# EAGLE board Mote_RgbLedStripController (EAGLE 7.5.0)
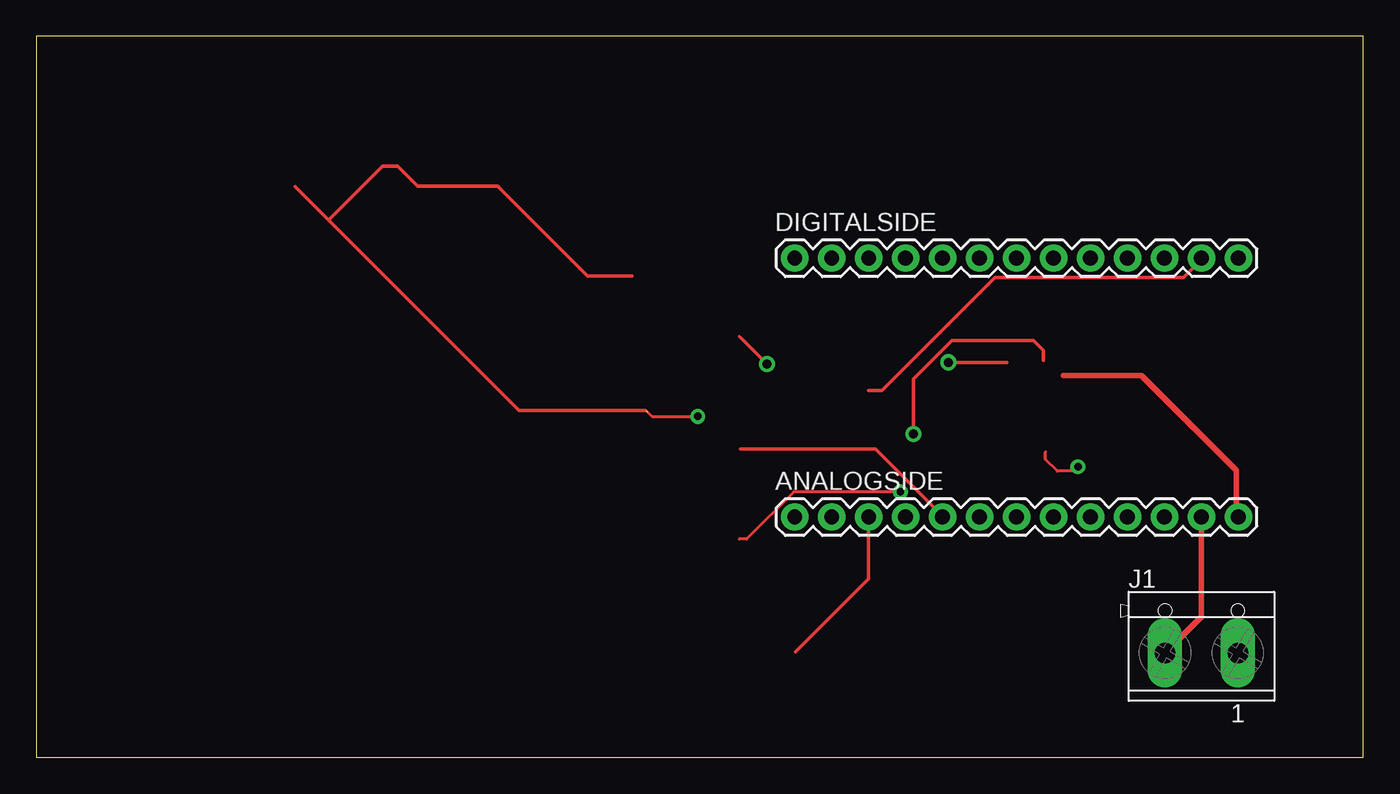
[diagram p0: board, top side]
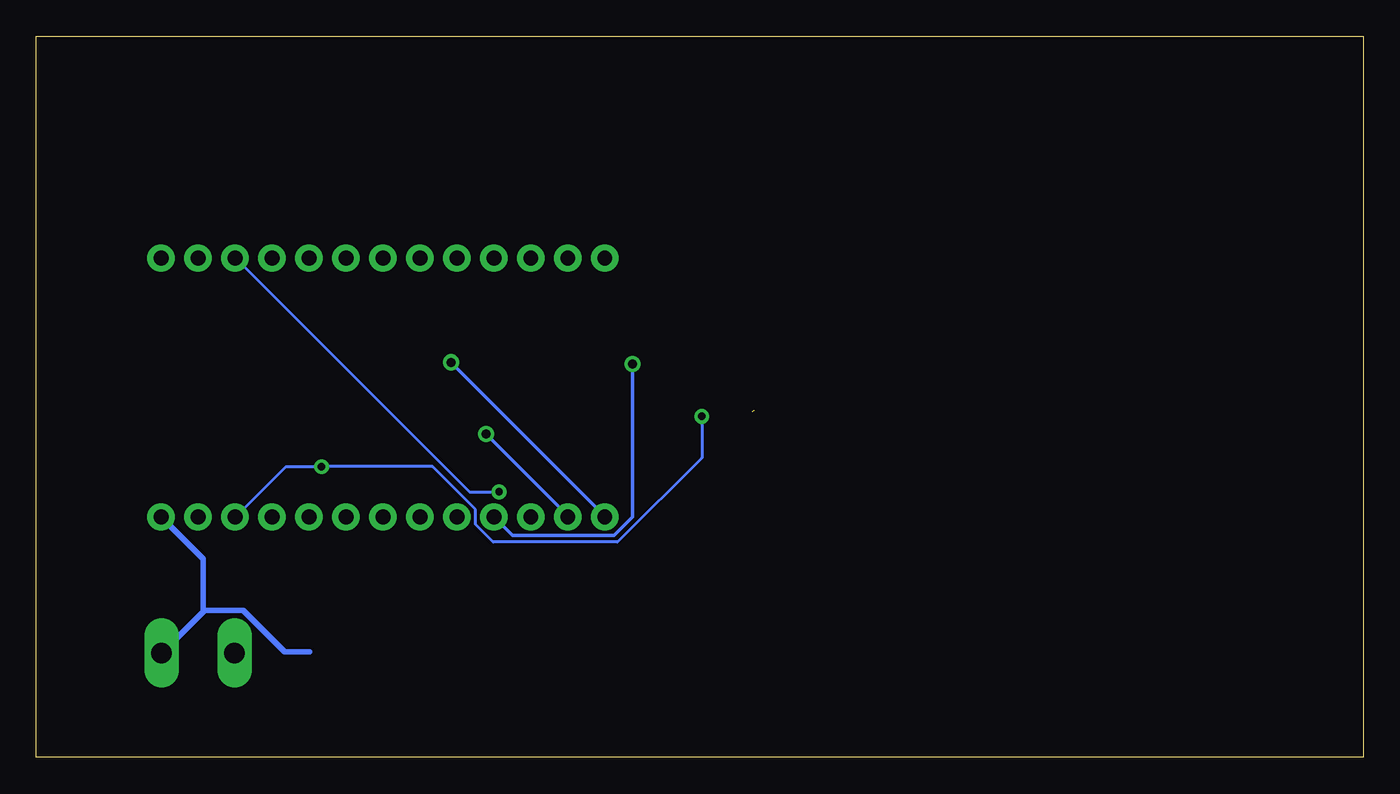
[diagram p1: board, bottom side, seen from below]

Size 91.11 x 49.52 mm. Coordinates in mm from the lower left corner, seen from the top.
Outline: 0,0 91.11,0 91.11,49.52 0,49.52 0,0
Copper layers (1*16): Top 0.035mm / dielectric 1.5mm / Bottom 0.035mm
Design rules "SparkFun": minimum track width 8mil, minimum drill 20mil, track to track 8mil, track to pad 8mil, pad to pad 8mil, via to via 8mil, smd to smd 8mil, copper to edge 10mil, drill to drill 8mil, minimum pad ring 12mil, minimum via ring 10mil, stop-mask expansion 4mil, vias tented up to drill 25mil, thermal gap 10mil
Net classes: 1 power: width 0.381 mm, clearance 0.254 mm

## Footprints (pad centres in the part's own frame; a part is rotated, then mirrored left to right if it is on the bottom)
1X13 = drill 1.016 pad 1.88: 1 0,0; 2 2.54,0; 3 5.08,0; 4 7.62,0; 5 10.16,0; 6 12.7,0; 7 15.24,0; 8 17.78,0; 9 20.32,0; 10 22.86,0; 11 25.4,0; 12 27.94,0; 13 30.48,0
TERMINAL_BLOCK_2P_5 = drill 1.4 pad 2.38 long: 1 2.5,-0.45; 2 -2.5,-0.45

## Placement (x,y rotation side)
ANALOGSIDE  M13  [1X13]  52.07,16.51 0 top
DIGITALSIDE  M13  [1X13]  52.07,34.29 0 top
J1  CON_TERMINAL_BLOCK_02-5MM  [TERMINAL_BLOCK_2P_5]  80.01,7.62 0 top

## Library data of the parts
ANALOGSIDE DIGITALSIDE = SparkFun-Connectors
J1 = dp_devices

## Nets
A0: ANALOGSIDE.1
A1: ANALOGSIDE.2
A2: ANALOGSIDE.3
A3: ANALOGSIDE.4
A4_SDA: ANALOGSIDE.5
A5_SCL: ANALOGSIDE.6
A6: ANALOGSIDE.7
A7: ANALOGSIDE.8
D0_RX: ANALOGSIDE.9
D1_TX: ANALOGSIDE.10
D2: DIGITALSIDE.12
D3: DIGITALSIDE.11
D4: DIGITALSIDE.10
D5: DIGITALSIDE.9
D6: DIGITALSIDE.8
D7: DIGITALSIDE.7
D8: DIGITALSIDE.6
D9: DIGITALSIDE.5
D10_SS: DIGITALSIDE.4
D11_MOSI: DIGITALSIDE.3
D12_MISO: DIGITALSIDE.2
D13_SCK: DIGITALSIDE.1
GND [power]: ANALOGSIDE.13 J1.1
PWR [power]: ANALOGSIDE.12 J1.2
RST: DIGITALSIDE.13
VCC: ANALOGSIDE.11

## Tracks (layer width: path | path; a pad name or v marks a point on that pad's centre or on a via)
A0  (via drill 0.61)
  Top 0.254: v62.64,27.13 66.64,27.13
  Bottom 0.254: v62.64,27.13 52.12,16.61 ANALOGSIDE.1
A1  (via drill 0.61)
  Top 0.254: 69.15,27.24 69.15,27.93 68.47,28.61 62.87,28.61 60.24,25.98 v60.24,22.21
  Bottom 0.254: v60.24,22.21 54.63,16.61 ANALOGSIDE.2
A2
  Top 0.254: ANALOGSIDE.3 57.15,12.27 52.12,7.24
A3  (via drill 0.61)
  Top 0.203: 48.26,28.9 48.35,28.84
  Top 0.254: v50.18,27.01 48.35,28.84
  Bottom 0.254: v50.18,27.01 50.18,16.5 51.44,15.24 58.41,15.24 59.66,16.5 ANALOGSIDE.4
A4_SDA
  Top 0.254: 48.35,21.18 57.61,21.18 62.18,16.61 ANALOGSIDE.5
D2
  Top 0.254: 57.15,25.18 58.06,25.18 65.84,32.96 78.75,32.96 80.01,34.21 DIGITALSIDE.12
D3  (via drill 0.51)
  Top 0.203: 48.26,14.99 48.77,14.99 52.02,18.24 v59.33,18.24
  Bottom 0.203: v59.33,18.24 61.37,18.24 77.42,34.29 DIGITALSIDE.11
GND
  Top 0.381: 82.53,16.61 ANALOGSIDE.13 82.41,16.73 82.41,19.7 75.89,26.21 70.52,26.21
  Bottom 0.381: 72.35,7.24 74.07,7.24 76.92,10.1 79.55,10.1 | 79.55,10.1 82.41,7.24 J1.1 | 79.55,10.1 79.67,10.21 79.67,13.64 82.53,16.5 ANALOGSIDE.13
PWR
  Top 0.381: ANALOGSIDE.12 80.01,9.64 77.61,7.24 J1.2
VCC  (via drill 0.51)  (1 unrouted)
  Top 0.203: 69.29,20.98 69.29,20.47 70.1,19.66 71.22,19.66 v71.53,19.96 | v45.41,23.42 42.27,23.42 41.96,23.72
  Top 0.254: 40.92,33.07 37.83,33.07 31.77,39.13 31.75,39.21 31.66,39.24 26.18,39.24 24.8,40.62 23.77,40.62 20.06,36.9 | 41.83,23.81 33.15,23.81 20.06,36.9 | 20.06,36.9 17.83,39.13 17.78,39.21
  Bottom 0.203: ANALOGSIDE.11 77.42,16.51 73.97,19.96 v71.53,19.96 63.91,19.96 60.96,17.02 60.96,16 59.74,14.78 51.21,14.78 45.41,20.57 v45.41,23.42